# Altium PCB SensorBoard.PcbDoc
Units mm, origin at the board's own origin, x right, y up, seen from the top; angles counter-clockwise.
Board outline 70 x 50 mm, 2 copper layers (Top Layer, Bottom Layer), stack 1.571 mm thick; 56 components, 27 nets, 178 pads, 64 vias.
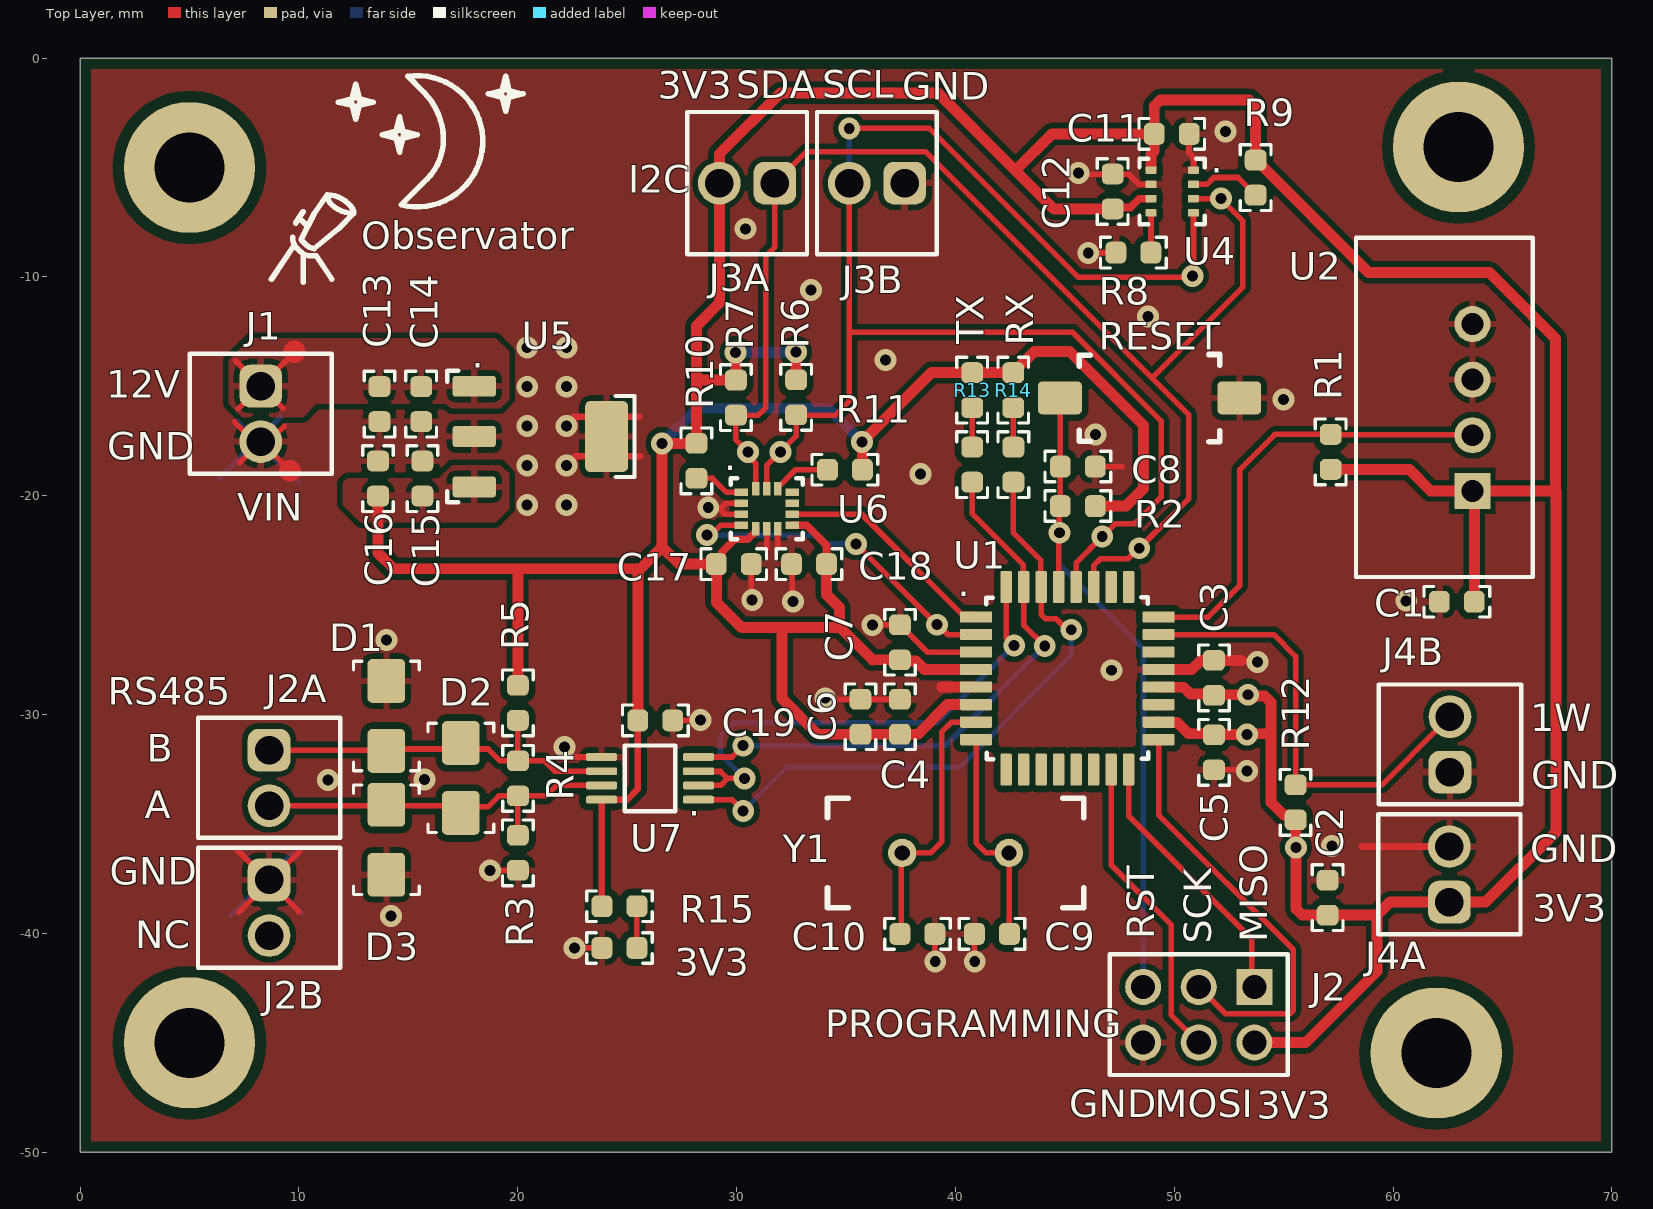
[diagram p0: Top Layer view]
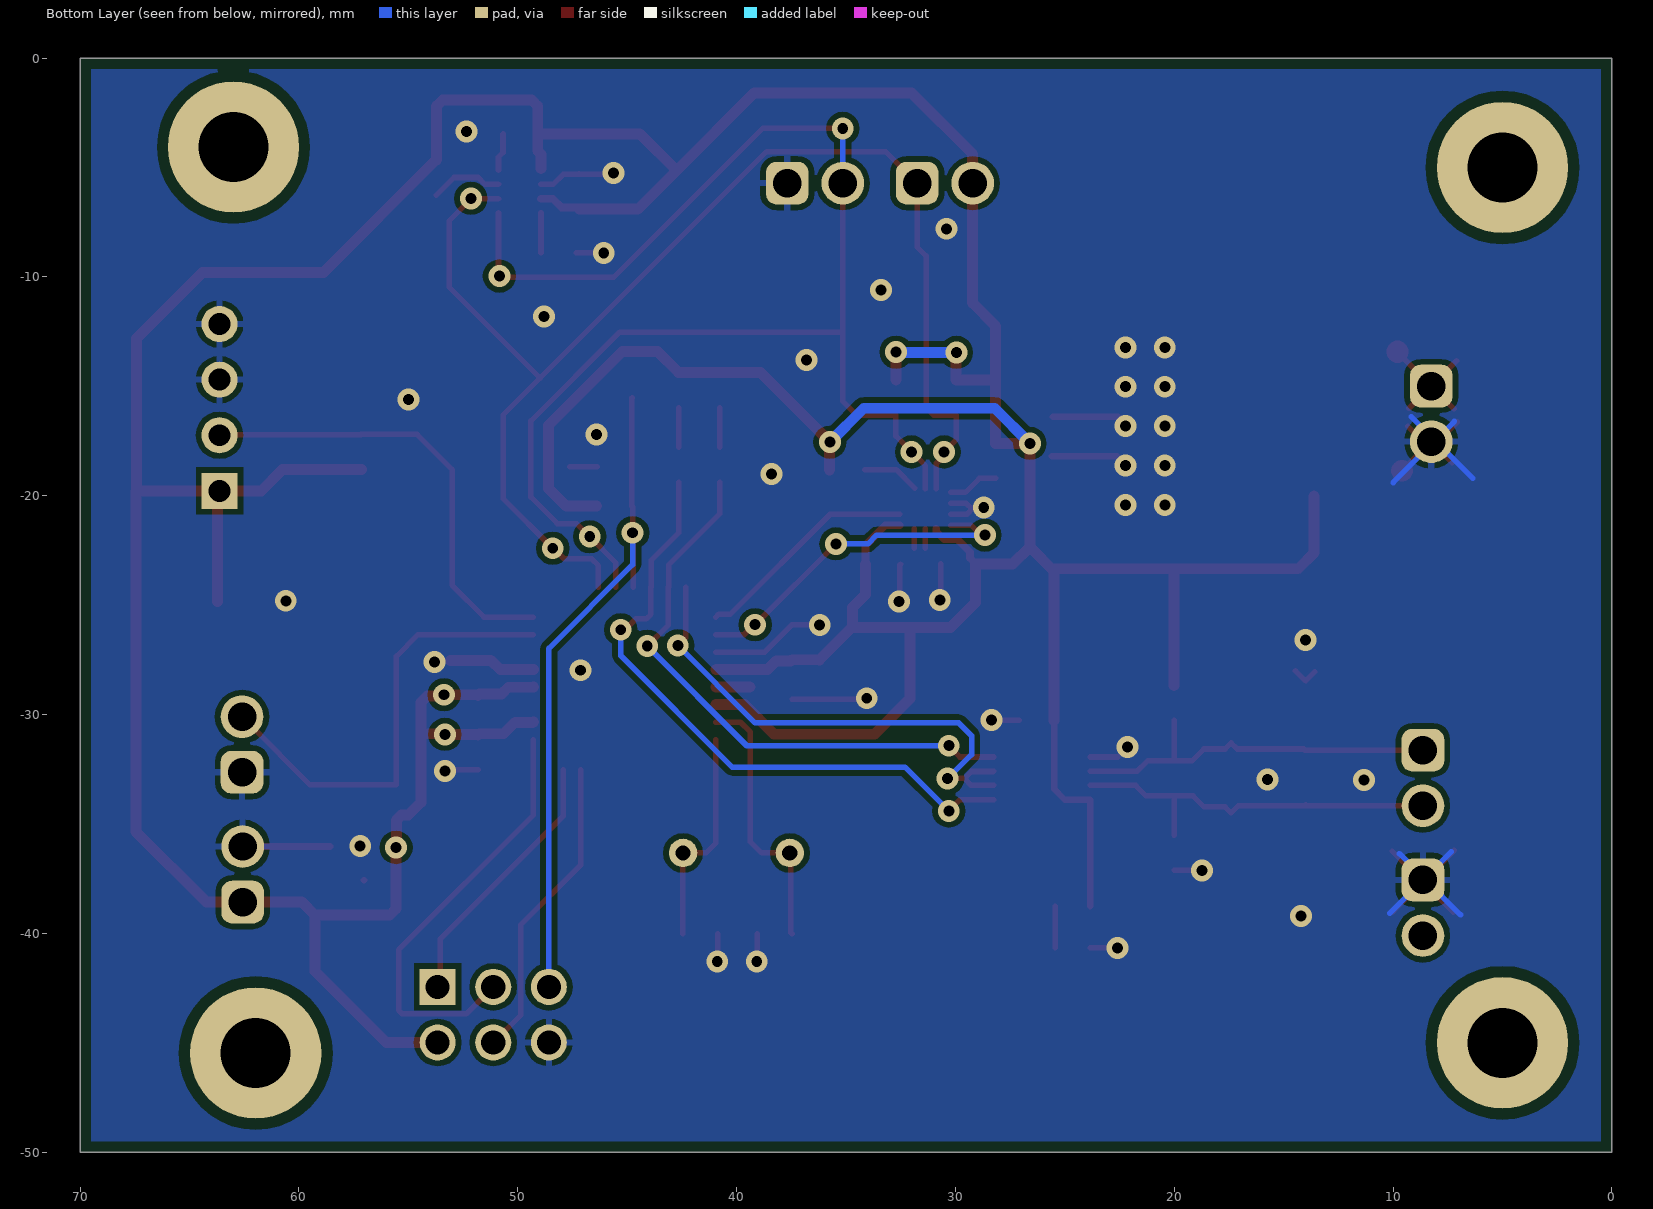
[diagram p1: Bottom Layer view, seen from below]
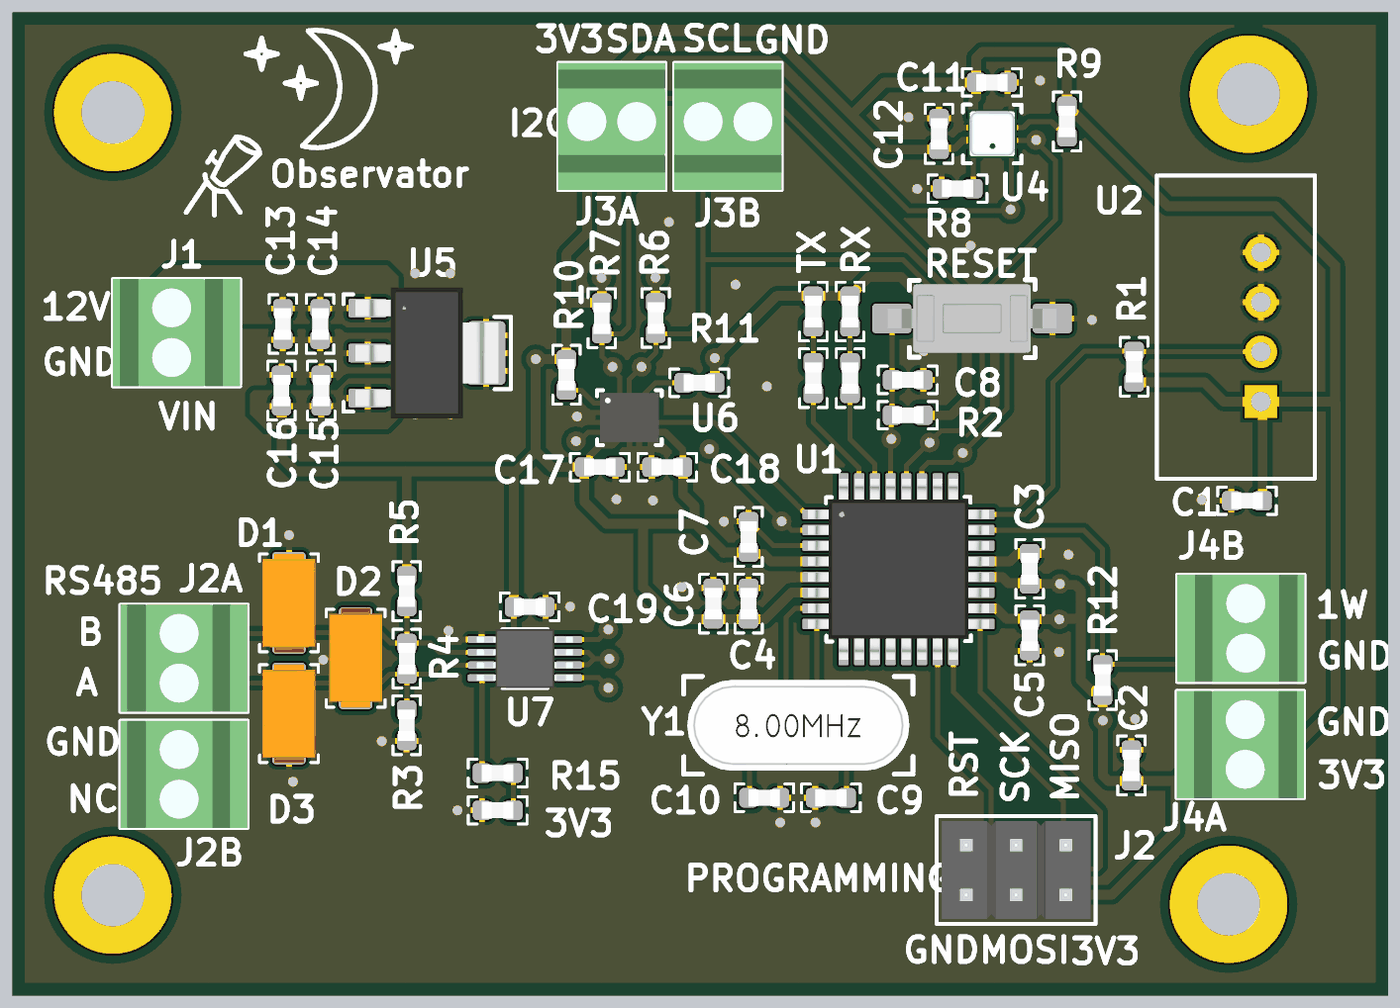
[diagram p2: 3D render of the assembled board from above, using the file's embedded part models]

## Layer stack, top to bottom
Top Solder: solder mask 0.0102, Solder Resist, Dk 3.5
Top Layer: signal copper 0.0356
Dielectric 1: dielectric 1.5, FR-4, Dk 4.8
Bottom Layer: signal copper 0.0356
Bottom Solder: solder mask 0.0102, Solder Resist, Dk 3.5

## Board outline
0,-50 0,0 70,0 70,-8 70,-50

## Design rules (kind name [scope] priority, off if disabled: settings)
BoardOutlineClearance [All] p1: gap=0.5 ignorepadtopadclearanceinfootprint=FALSE
Clearance Clearance_MH [InPadClass('MH')] p1: gap=0.5 ignorepadtopadclearanceinfootprint=FALSE
Clearance [All] p2: gap=0.25 ignorepadtopadclearanceinfootprint=FALSE except(0.15: Arc-Arc Arc-Track Arc-SMDPad Track-Track Track-SMDPad SMDPad-SMDPad SMDPad-THPad SMDPad-Via SMDPad-Hole; 0.3: SMDPad-Fill SMDPad-Poly SMDPad-Region)
HoleSize [All] p1: absolutevalues=TRUE maxlimit=3.2 minlimit=0.025 maxpercent=80.000 minpercent=20.000
HoleToHoleClearance [All] p1: gap=0.75 allowstackedmicrovias=TRUE
MinimumSolderMaskSliver [All] p1: minsoldermaskwidth=0.076
PolygonConnect [All] p1: thpad.connectstyle=Relief thpad.reliefconductorwidth=0.3 thpad.reliefentries=4 thpad.polygonreliefangle="90 Angle" thpad.airgapwidth=0.254 smdpad.connectstyle=Relief smdpad.reliefconductorwidth=0.3 smdpad.reliefentries=4 smdpad.polygonreliefangle="90 Angle" smdpad.airgapwidth=0.254 via.connectstyle=Direct via.reliefconductorwidth=0.3 via.reliefentries=4 via.polygonreliefangle="90 Angle" via.airgapwidth=0.254
RoutingVias [All] p1: holewidth=3 width=7 viastyle="Through Hole" minholewidth=0.5 minwidth=1 maxholewidth=0.711 maxwidth=1.27
SilkToSilkClearance [All] p1: silktosilkclearance=0.01
SilkToSolderMaskClearance [IsPad] p1: minsilkscreentomaskgap=0.01 clearancetoexposedcopper=FALSE
SolderMaskExpansion [All] p1: expansion=0.102 istentingtop=FALSE
Width [All] p1: maxlimit=1 minlimit=0.254 preferedwidth=0.254
25 further rules are at their usual default settings.

## Classes and differential pairs
pad class MH: Free-MH

## Components (designator, comment, footprint, x,y, rotation, side; value= is the part's Value field where it differs from the comment)
3V3 "TBD" CASE0603 24.648,-40.664 r180 top
C1 "100nF" CASE0603 62.913,-24.844 r180 top
C2 "100nF" CASE0603 57.011,-38.368 r90 top
C3 "100nF" CASE0603 51.816,-28.321 r270 top
C4 "100nF" CASE0603 37.465,-30.099 r270 top
C5 "100nF" CASE0603 51.816,-31.725 r90 top
C6 "10uF" CASE0603 35.661,-30.099 r270 top
C7 "100nF" CASE0603 37.465,-26.695 r270 top
C8 "100nF" CASE0603 45.593,-18.666 r0 top
C9 "100nF" CASE0603 41.669,-40.022 r0 top
C10 "100nF" CASE0603 38.265,-40.022 r180 top
C11 "100nF" CASE0603 49.886,-3.464 r0 top
C12 "100nF" CASE0603 47.188,-6.096 r90 top
C13 "10uF" CASE0603 13.683,-15.811 r90 top
C14 "100nF" CASE0603 15.588,-15.811 r90 top
C15 "100nF" CASE0603 15.646,-19.215 r270 top
C16 "10uF" CASE0603 13.614,-19.215 r270 top
C17 "100nF" CASE0603 29.87,-23.124 r0 top
C18 "100nF" CASE0603 33.31,-23.124 r180 top
C19 "100nF" CASE0603 26.287,-30.264 r180 top
D1 "SMAJ5.0CA" SMA 13.995,-30.063 r90 top
D2 "SMAJ5.0CA" SMA 17.399,-32.893 r270 top
D3 "SMAJ5.0CA" SMA 13.995,-35.72 r90 top
J1 "691210910002" 691210910002 8.255,-16.256 r270 top
J2 "PH2-06-UA" Header_2x3_2.54_Male 53.661,-42.444 r180 top
J2A "691210910002" 691210910002 8.636,-32.893 r270 top
J2B "691210910002" 691210910002 8.636,-38.827 r270 top
J3A "691210910002" 691210910002 30.48,-5.715 r180 top
J3B "691210910002" 691210910002 36.414,-5.715 r180 top
J4A "691210910002" 691210910002 62.572,-37.298 r90 top
J4B "691210910002" 691210910002 62.6,-31.364 r90 top
R1 "10K" CASE0603 57.15,-17.996 r90 top
R2 "10K" CASE0603 45.593,-20.47 r180 top
R3 "10K" CASE0603 20.003,-36.318 r90 top
R4 "10K" CASE0603 20.011,-32.914 r90 top
R5 "10K" CASE0603 20.003,-29.464 r90 top
R6 "10K" CASE0603 32.722,-15.503 r270 top
R7 "10K" CASE0603 29.968,-15.514 r270 top
R8 "10K" CASE0603 48.133,-8.889 r180 top
R9 "10K" CASE0603 53.721,-5.461 r270 top
R10 "10K" CASE0603 28.164,-18.405 r270 top
R11 "10K" CASE0603 34.95,-18.813 r180 top
R12 "10K" CASE0603 55.544,-34.009 r90 top
R13 "10K" CASE0603 40.767,-15.173 r270 top
R14 "10K" CASE0603 42.644,-15.173 r270 top
R15 "10K" CASE0603 24.648,-38.759 r0 top
RESET "PTS636 SL43 SMTR LFS" "SMT Button" 48.875,-15.528 r0 top
RX "TBD" CASE0603 42.648,-18.577 r270 top
TX "TBD" CASE0603 40.767,-18.577 r270 top
U1 "ATMEGA328P-AU" TQFP-32 45.117,-28.342 r0 top
U2 "AM2302/DHT22" AM2302_TEMP_HUMID_SENSOR 63.627,-19.774 r90 top
U4 "BME280" VFLGA-8 49.911,-6.096 r0 top
U5 "MCP1703T-3302E/MB" SOT-223-3 21.036,-17.294 r0 top
U6 "LSM6DSOXTR" VFLGA-14 31.377,-20.595 r0 top
U7 "MAX3471CUA+" TSSOP-8 26.045,-32.914 r180 top
Y1 "AS-16.000-18" HC-49/US 40.005,-36.322 r0 top

## Footprints (in the part's own frame and the unit in brackets; to place one, negate y for a bottom-side part, rotate by r counter-clockwise, add the part's x,y. Pads: shape width x height; smd on the part's side, far side on the other; paste and mask are expansions set on the pad)
691210910002 [mm] "2,54mm - modular - green - Horizontal wire entry - Cage clamp - 0,8mm2 wires - 02p"
  rrect50% 1.95x1.95 hole 1.3: 1(-1.27,0)
  round 1.95 hole 1.3: 2(1.27,0)
  silkscreen extent -2.74,-3.25 2.74,3.25, body extent -2.74,-3.25 2.74,3.25, height 8.55
AM2302_TEMP_HUMID_SENSOR [mm]
  rect 1.65x1.65 hole 1: 1(0,0)
  round 1.65 hole 1: 2(2.54,0) 3(5.08,0) 4(7.62,0)
  silkscreen extent -3.94,-2.76 11.56,5.32, body extent -3.74,-2.56 11.36,5.12, height 25.1
CASE0603 [mm]
  rrect50% 0.95x1 smd: 1(-0.8,0) 2(0.8,0)
  silkscreen extent -1.5,-0.7 1.5,0.7, body extent -0.8,-0.43 0.8,0.43, height 0.85
HC-49/US [mm] "Crystal, Thru-Hole; 2 Leads"
  round 1.3 hole 0.7: 1(-2.44,0) 2(2.44,0)
  silkscreen extent -5.85,-2.5 5.85,2.5, body extent -5.67,-2.33 5.67,2.33, height 3.61
Header_2x3_2.54_Male [mm]
  rect 1.65x1.65 hole 1.1: 1(0,0)
  round 1.65 hole 1.1: 2(0,2.54) 3(2.54,0) 4(2.54,2.54) 5(5.08,0) 6(5.08,2.54)
  silkscreen extent -1.52,-1.48 6.6,4.02, body extent -1.27,-1.23 6.35,3.77, height 9.01
SMA [mm] "Resistor CASE 1206"
  rrect25% 2x1.72 smd mask+0.102: 1(-1.6,0) 2(1.6,0)
  silkscreen extent -2.5,-1.5 2.5,1.5, body extent -2.54,-1.35 2.51,1.35, height 2.17
"SMT Button" [mm] "Button"
  rrect25% 2x1.5 smd: 1(-4.1,0) 2(4.1,0)
  silkscreen extent -3.21,-2 3.21,1.98, body extent -4.3,-1.75 4.3,1.75, height 4.3
SOT-223-3 [mm]
  rrect25% 1.97x0.95 smd: 1(-3.025,2.3) 2(-3.025,0) 3(-3.025,-2.3)
  rrect25% 1.97x3.25 smd: 4(3.025,0)
  silkscreen extent -4.26,-3 4.3,3, body extent -3.65,-3.35 3.65,3.35, height 1.8
TQFP-32 [mm]
  rrect25% 1.47x0.52 smd: 1(-4.17,2.8) 2(-4.17,2) 3(-4.17,1.2) 4(-4.17,0.4) 5(-4.17,-0.4) 6(-4.17,-1.2) 7(-4.17,-2) 8(-4.17,-2.8) 17(4.17,-2.8) 18(4.17,-2) 19(4.17,-1.2) 20(4.17,-0.4) 21(4.17,0.4) 22(4.17,1.2) 23(4.17,2) 24(4.17,2.8)
  rrect25% 0.52x1.47 smd: 9(-2.8,-4.17) 10(-2,-4.17) 11(-1.2,-4.17) 12(-0.4,-4.17) 13(0.4,-4.17) 14(1.2,-4.17) 15(2,-4.17) 16(2.8,-4.17) 25(2.8,4.17) 26(2,4.17) 27(1.2,4.17) 28(0.4,4.17) 29(-0.4,4.17) 30(-1.2,4.17) 31(-2,4.17) 32(-2.8,4.17)
  silkscreen extent -3.7,-3.7 3.7,3.7, body extent -4.62,-4.62 4.62,4.62, height 1.2
TSSOP-8 [mm]
  rrect50% 1.425x0.36 smd: 1(-2.212,0.975) 2(-2.212,0.325) 3(-2.212,-0.325) 4(-2.212,-0.975) 5(2.212,-0.975) 6(2.212,-0.325) 7(2.212,0.325) 8(2.212,0.975)
  silkscreen extent -1.15,-1.5 1.15,1.5, body extent -2.45,-1.5 2.45,1.5, height 1.1
VFLGA-8 [mm] "Sensor"
  rrect25% 0.5x0.35 smd: 1(0.97,0.975) 2(0.97,0.325) 3(0.97,-0.325) 4(0.97,-0.975) 5(-0.97,-0.975) 6(-0.97,-0.325) 7(-0.97,0.325) 8(-0.97,0.975)
  silkscreen extent -1.5,-1.5 1.49,1.5, body extent -1.25,-1.25 1.25,1.25, height 1
VFLGA-14 [mm]
  rect 0.61x0.35 smd mask+0: 1(-1.16,0.75) 2(-1.16,0.25) 3(-1.16,-0.25) 4(-1.16,-0.75) 8(1.16,-0.75) 9(1.16,-0.25) 10(1.16,0.25) 11(1.16,0.75)
  rect 0.35x0.61 smd mask+0: 5(-0.5,-0.91) 6(0,-0.91) 7(0.5,-0.91) 12(0.5,0.91) 13(0,0.91) 14(-0.5,0.91)
  silkscreen extent -1.65,-1.4 1.65,1.4, body extent -1.5,-1.25 1.5,1.25, height 0.86

## Part data
3V3 RX TX: library part LED, "Typical INFRARED GaAs LED"
C1 C2 C3 C4 C5 C7 C8 C9 C10 C11 C12 C14 C15 C17 C18 C19: library part Capacitor_100nF, "CAP CER 100nF 5% 25V X7R 0603", MFR=KEMET, MFR PN=C0603C104J3RAC, Datasheet=https://eu.mouser.com/ProductDetail/KEMET/C0603C104J3RAC?qs=zlI8QACJnq%252BcGF637t1xBQ%3D%3D, Supplier=Mouser, Supplier PN=80-C0603C104J3RAC
C6 C13 C16: library part Capacitor_10uF, "CAP CER 10uF 20% 25V X5R 0603", MFR=TDK, MFR PN=C1608X5R1E106M080AC, Datasheet=https://eu.mouser.com/ProductDetail/TDK/C1608X5R1E106M080AC?qs=dfay7wIA1uGdHfZTkqsICA%3D%3D, Supplier=Mouser, Supplier PN=810-C1608X5R1E106M
D1 D2 D3: library part Diode_SMAJ5.0CA, "9.2V Clamp 43.5A Ipp Tvs Diode Surface Mount DO-214AC (SMA)", MFR="Good-Ark Semiconductor", Datasheet=https://www.digikey.ro/en/products/detail/good-ark-semiconductor/SMAJ5-0CA/18649098, MFR PN=SMAJ5.0CA, Supplier="Digi Key", Supplier PN=4786-SMAJ5.0CACT-ND
J1 J2A J2B J3A J3B J4A J4B: library part Connector_691210910002, "TERM BLOCK 2P HORIZON 2.54MM PCB", MFR=Wurth, Datasheet=https://www.digikey.ro/en/products/detail/w%C3%BCrth-elektronik/691210910002/10668428?s=N4IgTCBcDaIGwE4CMYkAZlqxAugXyA, MFR PN=691210910002, Supplier="Digi Key", Supplier PN=732-691210910002-ND
J2: library part Connector_PH2-06-UA, "Connector Header Through Hole 6 position 0.100\" (2.54mm)", MFR="Adam Tech", Datasheet=https://www.digikey.ro/en/products/detail/adam-tech/PH2-06-UA/9830396, MFR PN=PH2-06-UA, Supplier="Digi Key", Supplier PN=2057-PH2-06-UA-ND
R1 R2 R3 R4 R5 R6 R7 R8 R9 R10 R11 R12 R13 R14 R15: library part Resistor_10K_0603, "RES 10K 1% 1/10W 0603", MFR=YAGEO, MFR PN=RC0603FR-0710KL, Datasheet=https://eu.mouser.com/ProductDetail/YAGEO/RC0603FR-0710KL?qs=grNVn54RoB%252B3GtjbJj3wJQ%3D%3D, Supplier=Mouser, Supplier PN=603-RC0603FR-0710KL
RESET: library part "Button_PTS636 SL43 SMTR LFS", "9.2V Clamp 43.5A Ipp Tvs Diode Surface Mount DO-214AC (SMA)", MFR=C&K, Datasheet=https://www.digikey.ro/en/products/detail/c-k/PTS636-SL43-SMTR-LFS/10071722, MFR PN="PTS636 SL43 SMTR LFS", Supplier="Digi Key", Supplier PN=CKN12309-1-ND
U1: library part IC_ATMEGA328, "AVR AVR® ATmega Microcontroller IC 8-Bit 20MHz 32KB (16K x 16) FLASH 32-TQFP (7x7)", MFR PN=Microchip, Datasheet=https://www.digikey.com/en/products/detail/microchip-technology/ATMEGA328P-AU/1832260, MFR=ATMEGA328P-AU, Supplier="Digi Key", Supplier PN=ATMEGA328P-AU-ND
U2: library part IC_AM2302/DHT22, "DIGITAL HUMIDITY, PRESSURE AND TEMPERATURE SENSOR", MFR=N/A, Datasheet=N/A, MFR PN=AM2302/DHT22, Supplier=N/A, Supplier PN=AM2302/DHT22
U4: library part IC_BME280, "DIGITAL HUMIDITY, PRESSURE AND TEMPERATURE SENSOR", MFR=Bosch, Datasheet=https://www.digikey.ro/en/products/detail/bosch-sensortec/BME280/6136306, MFR PN=BME280, Supplier="Digi Key", Supplier PN=828-1063-1-ND
U5: "IC REG LINEAR 3.3V 250MA SOT89-3", MFR=Microchip, Datasheet=https://www.digikey.ro/en/products/detail/microchip-technology/MCP1703T-3302E-MB/1635604, MFR PN=MCP1703T-3302E/MB, Supplier="Digi Key", Supplier PN=MCP1703T-3302E/MBCT-ND
U6: library part IC_LSM6DSOXTR, "Accelerometer, Gyroscope, 6 Axis Sensor I²C, SPI Output", MFR=STMicroelectronics, Datasheet=https://www.digikey.gr/en/products/detail/stmicroelectronics/LSM6DSOXTR/9841882?s=N4IgTCBcDaIDIGUCyA2AIgg8gDQCoCUQBdAXyA, MFR PN=LSM6DSOXTR, Supplier="Digi Key", Supplier PN=497-18367-1-ND
U7: library part IC_MAX3471, "IC TRANSCEIVER HALF 1/1 8UMAX", MFR="Analog Devices", Datasheet=https://www.digikey.com/en/products/detail/analog-devices-inc-maxim-integrated/max3471cua/1702211, MFR PN=MAX3471CUA+, Supplier="Digi Key", Supplier PN=MAX3471CUA+-ND
Y1: library part Crystal_AS-16.000-18, "16 MHz ±30ppm Crystal 18pF 40 Ohms HC-49/US", MFR="Raltron Electronics", Datasheet=https://www.digikey.ro/en/products/detail/raltron-electronics/AS-16-000-18/10271769, MFR PN=AS-16.000-18, Supplier="Digi Key", Supplier PN=2151-AS-16.000-18-ND

## Free pads (board coordinates)
  round 6 hole 3.2: MH(5,-45) MH(5,-5) MH(61.976,-45.466) MH(62.992,-4.064)

## Via types
v1: diameter 1, hole 0.5, Top Layer to Bottom Layer, 64 vias

## Nets (pads, with @x,y where several pads share a name; then routed paths per layer and width w, separated by ;. In a path a pad name is that pad's centre, name@x,y a point inside that pad or via, vN(x,y) a via of type N, cw(c..) or ccw(c..) an arc to the next point about the centre after c; other vN are vias at no path point)
3V3: C1.1 C2.1 C3.2 C4.2 C5.2 C6.2 C7.2 C11.1 C12.1 C15.2 C16.2 C17.1 C18.1 C19.2 J2.2 J3A.2 J4A.1 R1.1 R2.1 R5.2 R6.1 R7.1 R9.1 R10.1 R11.1 R12.1 R13.1 R14.1 R15.1 U1.4 U1.6 U1.18 U1.20 U2.1 U4.6 U4.8 U5.3 U6.5 U6.8 U7.8 | length 279.4
  Top Layer w0.254: v1(29.955,-13.45) v1@29.968,-13.464 ; v1(32.709,-13.439) v1@32.722,-13.453 ; C7.2 C7.2@37.522,-27.552 ; R9.1 R9.1@53.746,-4.661 ; J4A.1@61.863,-39.277 J4A.1
  Top Layer w0.3: U7.8 U7.8@23.848,-33.889 ; R15.1 U7.8@23.848,-33.889 ; C19.2 25.487,-33.405 25.003,-33.889 U7.8@23.848,-33.889
  Top Layer w0.35: C17.1 29.331,-22.863 29.331,-22.577 29.914,-21.995 30.517,-21.995 30.877,-21.635 U6.5 ; U6.8 33.198,-21.345 34.11,-22.257 C18.1 ; C12.1 47.255,-6.829 47.999,-6.829 48.407,-6.421 U4.6
  Top Layer w0.5: C16.2 13.614,-22.614 14.335,-23.335 20.003,-23.335 ; R5.2 20.003,-23.335 ; C19.2 25.487,-23.335 20.003,-23.335 ; 25.487,-23.451 26.6,-22.338 ; v1@29.968,-13.464 R7.1 28.164,-14.714 ; R6.1 v1@32.722,-13.453 ; C18.1 34.11,-24.51 34.699,-25.099 34.699,-25.987 34.739,-26.027 ; v1(35.737,-17.55) 38.914,-14.373 R13.1 R14.1 43.617,-13.4 45.222,-13.4 48.6,-16.778 48.6,-19.662 47.792,-20.47 R2.1 ; R11.1 v1@35.75,-17.563 ; 36.202,-27.508 36.202,-27.49 34.739,-26.027 ; 36.215,-27.495 C7.2 ; C7.2@37.522,-27.552 38.197,-27.552 38.588,-27.942 U1.4 ; U1.6 39.645,-29.542 38.288,-30.899 C4.2 C6.2 33.699,-30.899 32.069,-29.269 32.069,-26.027 ; C12.1 44.496,-6.896 42.736,-5.136 ; U4.8@48.941,-5.042 48.941,-4.399 49.086,-4.254 C11.1 ; U1.18 49.297,-30.352 50.129,-30.352 50.652,-30.876 51.766,-30.876 C5.2 51.836,-30.906 v1(53.332,-30.906) 53.362,-30.876 54.428,-30.876 ; U1.20 49.297,-28.752 50.434,-28.752 50.745,-29.063 51.758,-29.063 C3.2 51.845,-29.092 v1(53.367,-29.092) 53.419,-29.144 54.135,-29.144 54.428,-29.437 54.428,-30.876 ; J2.2 56.007,-44.984 59.264,-41.728 59.264,-39.168 ; R9.1 53.721,-2.199 53.428,-1.906 49.379,-1.906 49.086,-2.199 C11.1 ; R9.1@53.746,-4.661 58.885,-9.8 64.406,-9.8 67.424,-12.818 67.424,-19.787 ; R1.1 60.744,-18.796 61.722,-19.774 U2.1 ; C1.1 63.713,-19.86 U2.1 ; 26.6,-22.338 27.386,-23.124 C17.1 29.082,-23.136 29.082,-24.883 30.226,-26.027 32.069,-26.027 ; 26.6,-22.338 26.6,-22.223 v1(26.6,-17.605) R10.1 28.164,-14.714 ; 28.164,-14.714 28.164,-12.236 29.21,-11.19 J3A.2 29.21,-4.39 32,-1.6 39.2,-1.6 42.736,-5.136 ; 32.069,-26.027 34.556,-26.027 34.739,-26.027 ; 42.736,-5.136 44.407,-3.464 C11.1 ; 54.428,-30.876 54.428,-34.008 55.004,-34.584 55.319,-34.584 R12.1 55.544,-36.059 v1(55.557,-36.073) 55.557,-38.875 55.85,-39.168 59.264,-39.168 ; 59.264,-39.168 59.863,-38.568 J4A.1 64.232,-38.568 67.437,-35.363 67.437,-19.8 67.424,-19.787 ; U2.1 67.411,-19.774 67.424,-19.787
  Bottom Layer w0.254: v1(29.955,-13.45) v1@29.96,-13.445 ; v1@32.703,-13.445 v1(32.709,-13.439)
  Bottom Layer w0.5: v1(26.6,-17.605) 28.205,-16 34.187,-16 v1(35.737,-17.55) ; v1@29.96,-13.445 v1@32.703,-13.445
12V: C13.2 C14.2 J1.1 U5.1 | length 6.8
  Top Layer w0.254: 7.101,-13.832 J1.1 ; 7.21,-16.031 J1.1 ; 9.271,-16.002 J1.1 ; 9.8,-13.441 J1.1
  Top Layer w1: 9.8,-13.441 9.8,-13.4
CS: R11.2 U6.12 | length 2.6
  Top Layer w0.254: U6.12@31.851,-19.659 32.697,-18.813 R11.2
DIR: U1.32 U7.2 U7.3 | length 24.1
  Top Layer w0.254: U7.2 28.261,-33.234 29.276,-33.234 29.592,-32.918 ; U7.3 28.268,-32.6 29.274,-32.6 29.592,-32.918 ; v1(30.354,-32.918) 29.592,-32.918 ; U1.32 42.317,-26.482 v1(42.686,-26.851)
  Bottom Layer w0.254: v1(30.354,-32.918) 29.262,-31.826 29.262,-30.966 29.849,-30.379 39.158,-30.379 v1(42.686,-26.851)
GND: 3V3.2 C1.2 C2.2 C3.1 C4.1 C5.1 C6.1 C7.1 C8.2 C9.1 C10.1 C11.2 C12.2 C13.1 C14.1 C15.1 C16.1 C17.2 C18.2 C19.1 D1.2 D3.1 J1.2 J2.6 J2B.1 J3B.1 J4A.2 J4B.1 R3.1 R8.2 RESET.2 U1.3 U1.5 U1.21 U2.3 U2.4 U4.1 U4.7 U5.2 U5.4 U6.2 U6.3 U6.6 U6.7 U7.5 | length 79
  Top Layer w0.254: 7.058,-16.629 7.954,-17.526 J1.2 ; 7.2,-36.2 10,-39 ; 7.243,-39.036 10.043,-36.236 ; 7.289,-18.492 J1.2 ; J1.2@8.439,-17.717 9.336,-16.82 ; 9.584,-18.855 8.443,-17.714 J1.2 ; D1.2@13.57,-28.038 D1.2 D1.2@14.459,-27.999 ; v1@18.753,-37.118 R3.1 ; 22.583,-31.939 U7.5 ; v1(22.598,-40.664) 3V3.2 ; C19.1 v1@28.337,-30.264 ; v1(28.705,-20.538) 29.173,-20.538 29.242,-20.608 ; U6.3 29.48,-20.845 29.242,-20.608 ; U6.2 29.505,-20.345 29.242,-20.608 ; v1@30.67,-24.374 C17.2 C17.2@30.67,-23.099 ; 31.377,-22.392 U6.6 ; 31.877,-22.406 U6.7 ; C18.2 32.546,-23.16 32.546,-24.797 v1(32.582,-24.833) ; v1(34.053,-29.253) 34.106,-29.306 C6.1@35.661,-29.306 ; C6.1 C6.1@35.661,-29.306 ; v1@36.215,-25.895 C7.1 38.712,-27.142 U1.3 ; C4.1 37.458,-29.306 C6.1@35.661,-29.306 ; v1@39.065,-41.272 C10.1 ; v1@40.869,-41.272 C9.1 ; v1@45.945,-5.303 C12.2@47.195,-5.303 ; v1@46.083,-8.889 R8.2 ; C8.2@46.38,-18.666 C8.2 47.63,-18.666 ; C12.2 C12.2@47.195,-5.303 ; U4.7 48.381,-5.771 47.92,-5.31 47.202,-5.31 C12.2@47.195,-5.303 ; C11.2@50.657,-3.464 50.673,-3.48 50.673,-4.318 50.881,-4.526 U4.1 ; C5.1 v1@53.066,-32.525
  Top Layer w0.3: 22.559,-16.389 25.559,-16.389 ; 22.6,-18.2 25.6,-18.2 ; C2.2 C2.2@57.036,-37.568 ; 58.576,-36.028 J4A.2
  Top Layer w0.5: 39.389,-28.742 U1.5 ; U1.21 50.798,-27.942 51.219,-27.521 C3.1 53.066,-27.521
  Bottom Layer w0.254: 6.365,-19.198 9.165,-16.398 ; 6.912,-39.152 J2B.1@8.568,-37.497 ; 7.2,-16.6 10,-19.4 ; 7.345,-36.274 J2B.1@8.568,-37.497 ; 9.712,-36.352 J2B.1@8.568,-37.497 ; 10.145,-39.074 J2B.1@8.568,-37.497
  other v1: 39.078,-41.285 40.883,-41.285 14.2,-39.2 18.74,-37.131 57.2,-36 11.325,-32.988 15.742,-32.968 53.324,-32.573 22.143,-31.481 28.351,-30.251 47.136,-27.975 53.8,-27.6 14,-26.6 36.202,-25.908 60.6,-24.8 30.714,-24.771 20.432,-20.417 22.232,-20.417 38.4,-19 20.432,-18.617 22.232,-18.617 46.4,-17.2 20.432,-16.817 22.232,-16.817 55,-15.6 20.432,-15.017 22.232,-15.017 36.8,-13.8 20.432,-13.217 22.232,-13.217 48.8,-11.8 33.4,-10.6 46.07,-8.903 30.4,-7.8 45.63,-5.247 52.35,-3.363
INT1: U1.2 U6.4 | length 15.6
  Top Layer w0.254: v1(28.654,-21.799) 28.827,-21.799 29.282,-21.345 U6.4 ; v1(35.457,-22.2) v1(39.15,-25.893) ; v1@39.424,-26.118 39.648,-26.342 U1.2
  Bottom Layer w0.254: v1(28.654,-21.799) 33.599,-21.799 34,-22.2 v1(35.457,-22.2)
INT2: U1.1 U6.9 | length 10.4
  Top Layer w0.254: U6.9 35.719,-20.845 40.283,-25.409 40.814,-25.409 U1.1
Net3V3_1: 3V3.1 R15.2 | length 1.9
  Top Layer w0.254: 3V3.1 R15.2
NetC9_2: C9.2 U1.8 Y1.2 | length 10.1
  Top Layer w0.254: U1.8 40.947,-35.867 41.402,-36.322 Y1.2 42.457,-36.334 42.457,-40.01 C9.2
NetC10_2: C10.2 U1.7 Y1.1 | length 12.5
  Top Layer w0.254: C10.2 37.515,-39.972 37.515,-36.372 Y1.1 38.862,-36.322 39.37,-35.814 39.37,-30.803 39.831,-30.342 U1.7
NetD1_1: D1.1 D2.1 J2A.1 R4.2 R5.1 U7.6 | length 17.7
  Top Layer w0.254: J2A.1 14.035,-31.623 14.085,-31.572 17.12,-31.572 D2.1 17.678,-31.572 18.644,-31.572 19.186,-32.114 R4.2 ; R5.1 20.007,-30.268 20.007,-32.11 R4.2 ; U7.6 21.693,-32.589 21.218,-32.114 R4.2
NetD2_2: D2.2 D3.2 J2A.2 R3.2 R4.1 U7.7 | length 17.7
  Top Layer w0.254: J2A.2 13.952,-34.163 D3.2 14.037,-34.163 17.069,-34.163 D2.2 17.678,-34.214 18.634,-34.214 19.134,-33.714 R4.1 ; R3.2 20.007,-35.514 20.007,-33.718 R4.1 ; U7.7 21.765,-33.239 21.29,-33.714 R4.1
NetR9_2: R9.2 U4.2 | length 3.3
  Top Layer w0.254: U4.2 51.491,-5.771 51.805,-5.457 52.917,-5.457 R9.2
NetR13_2: R13.2 TX.1 | length 1.8
  Top Layer w0.254: TX.1 R13.2
NetR14_2: R14.2 RX.1 | length 1.8
  Top Layer w0.254: R14.2 42.646,-15.975 42.646,-17.775 RX.1
PDI/MOSI: J2.4 U1.15 | length 14.1
  Top Layer w0.254: U1.15 47.117,-36.862 49.856,-39.6 49.856,-43.72 J2.4
PDO/MISO: J2.1 U1.16 | length 12.3
  Top Layer w0.254: U1.16 47.917,-34.622 53.54,-40.245 53.54,-42.324 J2.1
R\E\S\E\T\: C8.1 J2.5 R2.2 RESET.1 U1.29 | length 31
  Top Layer w0.254: U1.29 v1@44.717,-21.689 ; v1(44.748,-21.689) 44.748,-20.515 R2.2 C8.1 44.793,-15.546 RESET.1
  Bottom Layer w0.254: v1(44.748,-21.689) 44.748,-23.148 48.581,-26.981 J2.5
RX: RX.2 U1.30 U7.1 | length 29.6
  Top Layer w0.254: U7.1 29.8,-33.889 30.303,-34.391 v1(30.303,-34.405) ; RX.2 42.648,-21.697 43.904,-22.953 U1.30@43.904,-24.172 ; U1.30 43.917,-25.422 44.116,-25.621 44.588,-25.621 45.09,-26.123 v1(45.292,-26.123)
  Bottom Layer w0.254: v1(30.303,-34.405) 32.308,-32.4 40.2,-32.4 45.292,-27.308 v1(45.292,-26.123)
SCK: J2.3 U1.17 | length 19.8
  Top Layer w0.254: U1.17 49.287,-34.592 55.437,-40.742 55.437,-43.521 55.288,-43.67 52.346,-43.67 J2.3
SCL: J3B.2 R6.2 U1.28 U4.4 U6.13 | length 66.5
  Top Layer w0.254: U6.13 31.375,-19.683 31.375,-18.625 v1(32,-18) 32.722,-17.278 R6.2 32.733,-16.314 34.518,-16.314 35.144,-15.688 35.144,-12.528 ; J3B.2 35.144,-12.528 ; v1(35.15,-3.213) 35.163,-3.2 38.8,-3.2 45.618,-10.018 50.478,-10.018 50.896,-9.6 50.841,-9.656 v1(50.841,-9.96) ; U1.28 45.517,-23.065 v1(46.711,-21.871) 47.308,-21.274 48.192,-21.274 49.4,-20.066 49.4,-16.583 45.345,-12.528 35.144,-12.528 ; v1@50.881,-9.656 U4.4
  Bottom Layer w0.254: J3B.2 35.15,-5.71 v1(35.15,-3.213)
SDA: J3A.1 R7.2 U1.27 U4.3 U6.14 | length 62.1
  Top Layer w0.254: v1@30.41,-18 30.41,-17.891 29.968,-17.449 R7.2 30.992,-16.314 31.341,-15.965 31.341,-9.035 31.75,-8.626 J3A.1 33.193,-4.272 38.634,-4.272 48.981,-14.619 ; v1(30.518,-18) 30.518,-18.163 30.877,-18.522 U6.14 ; U1.27 46.317,-23.191 46.628,-22.88 47.878,-22.88 48.358,-22.4 v1@48.379,-22.4 ; v1(48.4,-22.4) 50.657,-20.143 50.657,-16.296 48.981,-14.619 ; U4.3 52.131,-6.421 52.131,-6.446 53.138,-7.453 53.138,-10.462 48.981,-14.619
  other v1: 52.144,-6.408
SDO/SA0_LSM: R10.2 U6.1 | length 2.3
  Top Layer w0.254: R10.2 28.908,-19.205 29.548,-19.845 U6.1
SDO_BME: R8.1 U4.5 | length 1.8
  Top Layer w0.254: R8.1 48.937,-8.885 48.937,-7.075 U4.5
TEMPHUMID1: R1.2 U1.24 U2.2 | length 20.9
  Top Layer w0.254: U1.24 51.547,-25.542 53,-24.089 53,-18.8 54.604,-17.196 R1.2 57.169,-17.215 63.608,-17.215 U2.2
TEMPHUMID2: J4B.2 R12.2 U1.23 | length 20.8
  Top Layer w0.254: U1.23 54.549,-26.342 55.544,-27.336 R12.2 59.484,-33.209 62.234,-30.46 J4B.2@62.234,-29.998
TX: TX.2 U1.31 U7.4 | length 26.8
  Top Layer w0.254: U7.4 29.8,-31.939 30.303,-31.436 v1(30.303,-31.423) ; TX.2 40.767,-20.818 43.104,-23.155 U1.31@43.104,-24.172 ; U1.31 43.117,-25.908 v1(44.083,-26.874)
  Bottom Layer w0.254: v1(30.303,-31.423) 39.535,-31.423 v1(44.083,-26.874)
pads on no net: J2B.2 U1.9 U1.10 U1.11 U1.12 U1.13 U1.14 U1.19 U1.22 U1.25 U1.26 U6.10 U6.11

## Polygon pours and split planes (outlines as drawn)
GND on Top Layer "GND_L01_P003" (solid, remove dead copper, pour order 3): 0,0 70,0 70,-50 0,-50
3V3 on Top Layer "3V3_L01_P000" (solid, pour order 0): 16.4,-19.2 17,-18.6 19.2,-18.6 19.6,-19 19.6,-20.6 19,-21.2 12.8,-21.2 12,-20.4 12,-19.4 12.2,-19.2
12V on Top Layer "12V_L01_P002" (solid, pour order 2): 6.8,-13.8 7.8,-12.8 19,-12.8 19.6,-13.4 19.6,-15.603 19.206,-15.998 16.949,-15.998 16.707,-15.8 10.8,-15.8 10.193,-16.407 7.406,-16.407 6.8,-15.8
GND on Bottom Layer "GND_L02_P001" (solid, remove dead copper, pour order 1): 0,0 70,0 70,-50 0,-50

## Silkscreen, mask and mechanical layers (free items; w line width, h text height)
Top Overlay:
  lines w0.254: 8.745,-10.105 9.764,-8.577 ; 9.709,-8.179 ccw(c10.455,-8.179) 9.928,-8.707 10.053,-8.831 ccw(c10.549,-8.335) 10.549,-9.037 10.793,-9.037 11.5,-10.099 ; 9.848,-7.543 10.19,-7.019 ; 10,-7.3 10.2,-7.5 10.4,-7.7 ; 10.193,-10.237 10.193,-9.037 ; 11.3,-6.251 cw(c11.3,-7.583) 12.241,-6.641 12.359,-6.759 cw(c12.017,-7.1) 12.5,-7.1 ; 11.3,-6.251 ccw(c11.9,-6.251) 11.476,-6.676 ccw(c12.5,-5.651) 12.5,-7.1 ; 11.3,-6.251 10.7,-7.1 10.1,-8.3 10.359,-8.559 ccw(c10.7,-8.217) 10.7,-8.7 11.8,-7.8 12.5,-7.1 cw(c12.5,-7.1) 12.5,-7.1 ; 12.5,-7.1 ccw(c12.5,-7.1) 12.5,-7.1 ; 11.802,-2.009 12.602,-2.209 13.402,-2.009 12.602,-1.809 11.802,-2.009 ; 12.4,-2 12.6,-1.2 12.8,-2 12.6,-2.8 12.4,-2 ; 13.8,-3.5 14.6,-3.3 15.4,-3.5 14.6,-3.7 13.8,-3.5 ; 14.398,-3.491 14.598,-4.291 14.798,-3.491 14.598,-2.691 14.398,-3.491 ; 14.672,-6.71 ccw(c15.4,-3.8) 14.976,-0.83 15.702,-1.556 cw(c13.534,-3.724) 16.6,-3.724 cw(c14.045,-3.724) 15.852,-5.531 14.672,-6.71 ; 18.645,-1.639 19.445,-1.839 20.245,-1.639 19.445,-1.439 18.645,-1.639 ; 19.243,-1.63 19.443,-0.83 19.643,-1.63 19.443,-2.43 19.243,-1.63
  text "SDA" at 29.992,-1.837 h1.27
  text "SCL" at 33.912,-1.82 h1.27
  text "3V3" at 26.399,-1.854 h1.27
  text "GND" at 37.579,-1.896 h1.27
  text "I2C" at 25.058,-6.15 h1.27
  text "Observator" at 12.854,-8.746 h1.27
  text "12V" at 1.187,-15.531 h1.27
  text "GND" at 1.237,-18.363 h1.27
  text "VIN" at 7.176,-21.143 h1.27
  text "RS485" at 1.254,-29.546 h1.27
  text "1W" at 66.277,-30.769 h1.27
  text "B" at 3.054,-32.146 h1.27
  text "GND" at 66.321,-33.378 h1.27
  text "A" at 2.965,-34.734 h1.27
  text "GND" at 66.267,-36.751 h1.27
  text "GND" at 1.366,-37.776 h1.27
  text "3V3" at 66.355,-39.469 h1.27
  text "RST" at 49.079,-40.26 h1.27 r90
  text "MISO" at 54.244,-40.395 h1.27 r90
  text "SCK" at 51.692,-40.483 h1.27 r90
  text "NC" at 2.522,-40.688 h1.27
  text "PROGRAMMING" at 34.054,-44.746 h1.27
  text "GND" at 45.212,-48.403 h1.27
  text "MOSI" at 49.102,-48.403 h1.27
  text "3V3" at 53.766,-48.473 h1.27
Board:
  lines w0.254: 0,-50 67,-50 69,-50 70,-50 70,-8 70,0 0,0 0,-50
FAB:
  drawing of 163 lines, arcs and shapes, not listed
  text "Layer" at 87.769,-29.562 h1.52
  text "Name" at 96.614,-29.562 h1.52
  text "Material" at 116.038,-29.562 h1.52
  text "Thickness" at 132.864,-29.562 h1.52
  text "Constant" at 145.918,-29.562 h1.52
  text "Board Layer Stack" at 158.434,-29.562 h1.52
  text "Top Overlay" at 96.614,-32.61 h1.52
  text "Top Solder" at 96.614,-35.658 h1.52
  text "Solder Resist" at 116.038,-35.658 h1.52
  text "0.010mm" at 132.864,-35.658 h1.52
  text "3.5" at 145.918,-35.658 h1.52
  text "1" at 87.769,-38.706 h1.52
  text "Top Layer" at 96.614,-38.706 h1.52
  text "Copper" at 116.038,-38.706 h1.52
  text "0.036mm" at 132.864,-38.706 h1.52
  text "Dielectric 1" at 96.614,-41.754 h1.52
  text "FR-4" at 116.038,-41.754 h1.52
  text "1.500mm" at 132.864,-41.754 h1.52
  text "4.8" at 145.918,-41.754 h1.52
  text "2" at 87.769,-44.802 h1.52
  text "Bottom Layer" at 96.614,-44.802 h1.52
  text "Copper" at 116.038,-44.802 h1.52
  text "0.036mm" at 132.864,-44.802 h1.52
  text "Bottom Solder" at 96.614,-47.85 h1.52
  text "Solder Resist" at 116.038,-47.85 h1.52
  text "0.010mm" at 132.864,-47.85 h1.52
  text "3.5" at 145.918,-47.85 h1.52
  text "Bottom Overlay" at 96.614,-50.898 h1.52
  text "Total board thickness:" at 87.769,-53.946 h1.52
  text "1.591mm" at 132.864,-53.946 h1.52
Drill Drawing:
  circle w0.254: c85.771,-74.519 r0.847
  lines w0.254: 84.924,-86.373 85.347,-86.373 85.347,-86.796 86.194,-86.796 86.194,-86.373 86.617,-86.373 86.617,-85.526 86.194,-85.526 86.194,-85.103 85.347,-85.103 85.347,-85.526 84.924,-85.526 84.924,-86.373 ; 84.924,-82.563 85.347,-82.563 85.771,-82.986 86.194,-82.563 86.617,-82.563 86.194,-82.139 86.617,-81.716 86.194,-81.716 85.771,-81.293 85.347,-81.716 84.924,-81.716 85.347,-82.139 84.924,-82.563 ; 84.924,-77.483 86.617,-77.483 85.771,-79.176 84.924,-77.483 ; 84.924,-71.556 86.617,-71.556 86.617,-69.863 84.924,-69.863 84.924,-71.556 ; 84.924,-67.746 84.924,-67.323 85.347,-66.899 84.924,-66.476 84.924,-66.053 85.347,-66.053 85.771,-66.476 86.194,-66.053 86.617,-66.053 86.617,-66.476 86.194,-66.899 86.617,-67.323 86.617,-67.746 86.194,-67.746 85.771,-67.323 85.347,-67.746 84.924,-67.746
  lines w0.381: 83.405,-87.939 202.73,-87.939 ; 83.405,-65.079 202.73,-65.079 ; 96.171,-91.749 96.171,-61.269 ; 107.425,-91.749 107.425,-61.269 ; 132.755,-91.749 132.755,-61.269 ; 142.836,-91.749 142.836,-61.269 ; 157.803,-91.749 157.803,-61.269 ; 189.111,-91.749 189.111,-61.269 ; 83.405,-91.749 202.73,-91.749 202.73,-61.269 83.405,-61.269 83.405,-91.749
  text "Symbol" at 85.691,-63.936 h1.83
  text "Count" at 97.314,-63.936 h1.83
  text "Hole Size" at 108.568,-63.936 h1.83
  text "Plated" at 133.898,-63.936 h1.83
  text "Hole Type" at 143.979,-63.936 h1.83
  text "Drill Layer Pair" at 158.946,-63.936 h1.83
  text "Via/Pad" at 190.254,-63.936 h1.83
  text "64" at 97.314,-67.746 h1.52
  text "0.500mm (19.69mil)" at 108.568,-67.746 h1.52
  text "PTH" at 133.898,-67.746 h1.52
  text "Round" at 143.979,-67.746 h1.52
  text "Top Layer - Bottom Layer" at 158.946,-67.746 h1.52
  text "Via" at 190.254,-67.746 h1.52
  text "2" at 97.314,-71.556 h1.52
  text "0.700mm (27.56mil)" at 108.568,-71.556 h1.52
  text "PTH" at 133.898,-71.556 h1.52
  text "Round" at 143.979,-71.556 h1.52
  text "Top Layer - Bottom Layer" at 158.946,-71.556 h1.52
  text "Pad" at 190.254,-71.556 h1.52
  text "4" at 97.314,-75.366 h1.52
  text "1.000mm (39.37mil)" at 108.568,-75.366 h1.52
  text "PTH" at 133.898,-75.366 h1.52
  text "Round" at 143.979,-75.366 h1.52
  text "Top Layer - Bottom Layer" at 158.946,-75.366 h1.52
  text "Pad" at 190.254,-75.366 h1.52
  text "6" at 97.314,-79.176 h1.52
  text "1.100mm (43.31mil)" at 108.568,-79.176 h1.52
  text "PTH" at 133.898,-79.176 h1.52
  text "Round" at 143.979,-79.176 h1.52
  text "Top Layer - Bottom Layer" at 158.946,-79.176 h1.52
  text "Pad" at 190.254,-79.176 h1.52
  text "14" at 97.314,-82.986 h1.52
  text "1.300mm (51.18mil)" at 108.568,-82.986 h1.52
  text "PTH" at 133.898,-82.986 h1.52
  text "Round" at 143.979,-82.986 h1.52
  text "Top Layer - Bottom Layer" at 158.946,-82.986 h1.52
  text "Pad" at 190.254,-82.986 h1.52
  text "4" at 97.314,-86.796 h1.52
  text "3.200mm (125.98mil)" at 108.568,-86.796 h1.52
  text "PTH" at 133.898,-86.796 h1.52
  text "Round" at 143.979,-86.796 h1.52
  text "Top Layer - Bottom Layer" at 158.946,-86.796 h1.52
  text "Pad" at 190.254,-86.796 h1.52
  text "94 Total" at 97.314,-90.606 h1.52

## Dimensions
70,-50 to 70,0 on FAB
0,-50 to 70,-50 on FAB